# Allegro board commandModule_v1_3.brd
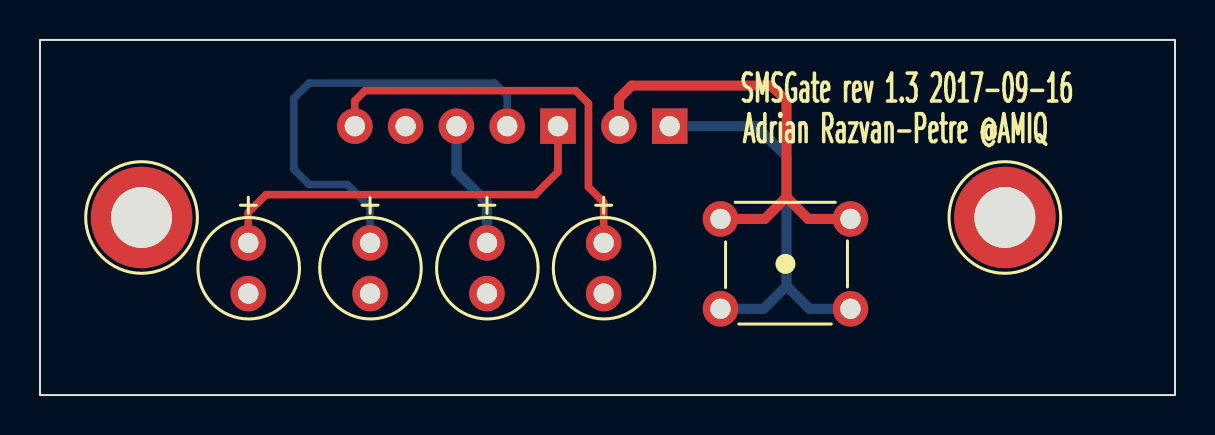
[diagram p0: board, top side]
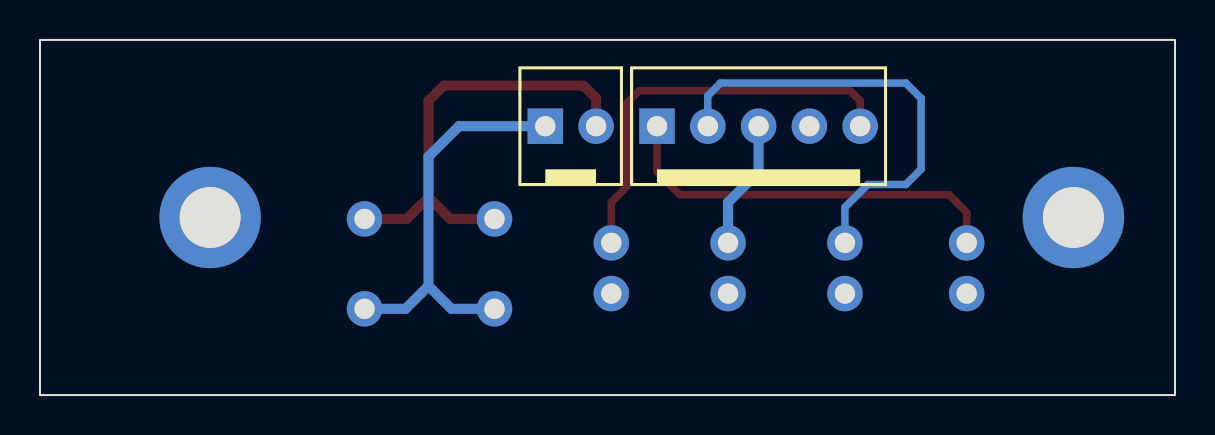
[diagram p1: board, bottom side, seen from below]

Outline 56.77 x 17.78 mm; copper layers: TOP, BOTTOM. Coordinates in mm from the lower left corner of the outline.
Outline path: rectangle 0,0 56.77,17.78

## Design rules (mm)
nets with their own width: min track width 0.508; nets GND LED1 N00429 N00447

## Placement (name value [footprint] x y rotation side)
D1  LED  [LED_5MM_2-54_GREEN]  10.42 6.35 270 top
D2  LED  [LED_5MM_2-54_ORANGE]  16.51 6.35 270 top
D3  LED  [LED_5MM_2-54_YELLOW]  22.36 6.35 270 top
D4  LED  [LED_5MM_2-54_RED]  28.19 6.35 270 top
J1  CON5  [SOCKET_MX_0GRD_1X5_2-54_V0]  25.91 13.46 90 bottom
J2  CON2  [SOCKET_MX_0GRD_1X2_2-54_V0]  31.5 13.46 90 bottom
NOREF  -  [unnamed]  48.26 8.89 0 top
NOREF#2  -  [unnamed]  5.08 8.89 0 top
SW1  SW RR  [SW_THT_TACT-65R-F_V0]  34.04 4.32 0 top

## Library data of the parts
D1-D4 = LED_0
J1 = CON5
J2 = CON2
SW1 = SW PUSHBUTTON-SPST-2_1

## Footprints (pads in the part's own frame, mm; a bottom-side part is the same pattern mirrored in y, then rotated)
LED_5MM_2-54_GREEN
  round 1.778 hole 1.016: 1(-1.27,0) 2(1.27,0)
LED_5MM_2-54_ORANGE
  round 1.778 hole 1.016: 1(-1.27,0) 2(1.27,0)
LED_5MM_2-54_RED
  round 1.778 hole 1.016: 1(-1.27,0) 2(1.27,0)
LED_5MM_2-54_YELLOW
  round 1.778 hole 1.016: 1(-1.27,0) 2(1.27,0)
SOCKET_MX_0GRD_1X2_2-54_V0
  rect 1.778x1.778 hole 1.016: 1(0,0)
  round 1.778 hole 1.016: 2(0,-2.54)
SOCKET_MX_0GRD_1X5_2-54_V0
  rect 1.778x1.778 hole 1.016: 1(0,0)
  round 1.778 hole 1.016: 2(0,-2.54) 3(0,-5.08) 4(0,-7.62) 5(0,-10.16)
SW_THT_TACT-65R-F_V0
  round 1.778 hole 1.016: 1(6.5,0) 2(0,0) 3(6.5,4.5) 4(0,4.5)
unnamed
  round 5.08 hole 3.048 unplated: (0,0)

## Nets
GND: D1.2(CATHODE) D2.2(CATHODE) D3.2(CATHODE) D4.2(CATHODE) J1.4
CHARGING: D2.1(ANODE) J1.2
LED1: D3.1(ANODE) J1.3
LED2: D4.1(ANODE) J1.5
LINE: D1.1(ANODE) J1.1
N00429: J2.2 SW1.3 SW1.4
N00447: J2.1 SW1.1 SW1.2

## Routing (per net, layer and track width the routed paths; a pad name or vN(x,y) marks a point on that pad's centre or on a via; arc(x,y) is an arc through that point)
CHARGING: length 22.7
  BOTTOM w0.381: J1.2 23.37,14.99 22.73,15.62 13.46,15.62 12.7,14.86 12.7,11.3 13.46,10.54 15.37,10.54 16.51,9.4 D2.1
LED1: length 6.5
  BOTTOM w0.508: D3.1 22.36,8.89 22.35,8.89 22.35,9.65 20.83,11.18 J1.3
LED2: length 20.7
  TOP w0.381: J1.5 15.75,14.73 16.26,15.24 26.8,15.24 27.43,14.61 27.43,10.41 28.19,9.65 D4.1
LINE: length 20.1
  TOP w0.381: D1.1 10.41,7.63 10.41,9.14 11.3,10.03 24.77,10.03 25.91,11.18 J1.1
N00429: length 22.6
  TOP w0.508: 37.34,9.91 36.25,8.82 SW1.4 ; 37.34,9.91 37.34,14.73 36.58,15.49 29.59,15.49 28.96,14.86 J2.2 ; 37.34,9.91 38.43,8.82 SW1.3
N00447: length 20.4
  BOTTOM w0.508: SW1.1 38.48,4.32 37.34,5.46 ; 37.34,5.46 36.2,4.32 SW1.2 ; 37.34,5.46 37.34,11.94 35.81,13.46 J2.1

## Text on the board
Ref Des/Silkscreen Top: SMSGate rev 1.3 2017-09-16 | Adrian Razvan-Petre @AMIQ
XSECTION_CHART: *  SURFACE - AIR 0 MIL | L1: TOP CONDUCTOR - COPPER 1.37 MIL | *  DIELECTRIC - FR-4 63 MIL | L2: BOTTOM CONDUCTOR - COPPER 1.37 MIL | DESIGN CROSS SECTION CHART | ___________________________ | TOTAL THICKNESS 65.74 MIL | 1-2
PLACE_BOUND_BOTTOM: FIGURE | 40.0 | 120.0 | SIZE | ALL UNITS ARE IN MILS | DRILL CHART: TOP to BOTTOM | PLATED | NON-PLATED | QTY | 19 | 2
